# Altium PCB PCB_MRR_ESP_3DP_v0.6.pcbdoc (part 1 of 2)
Units mil, origin at the board's own origin, x right, y up, seen from the top; angles counter-clockwise.
Board outline 5400 x 5140 mil, 2 copper layers (Top Layer, Bottom Layer); 119 components, 151 nets, 453 pads, 98 vias.
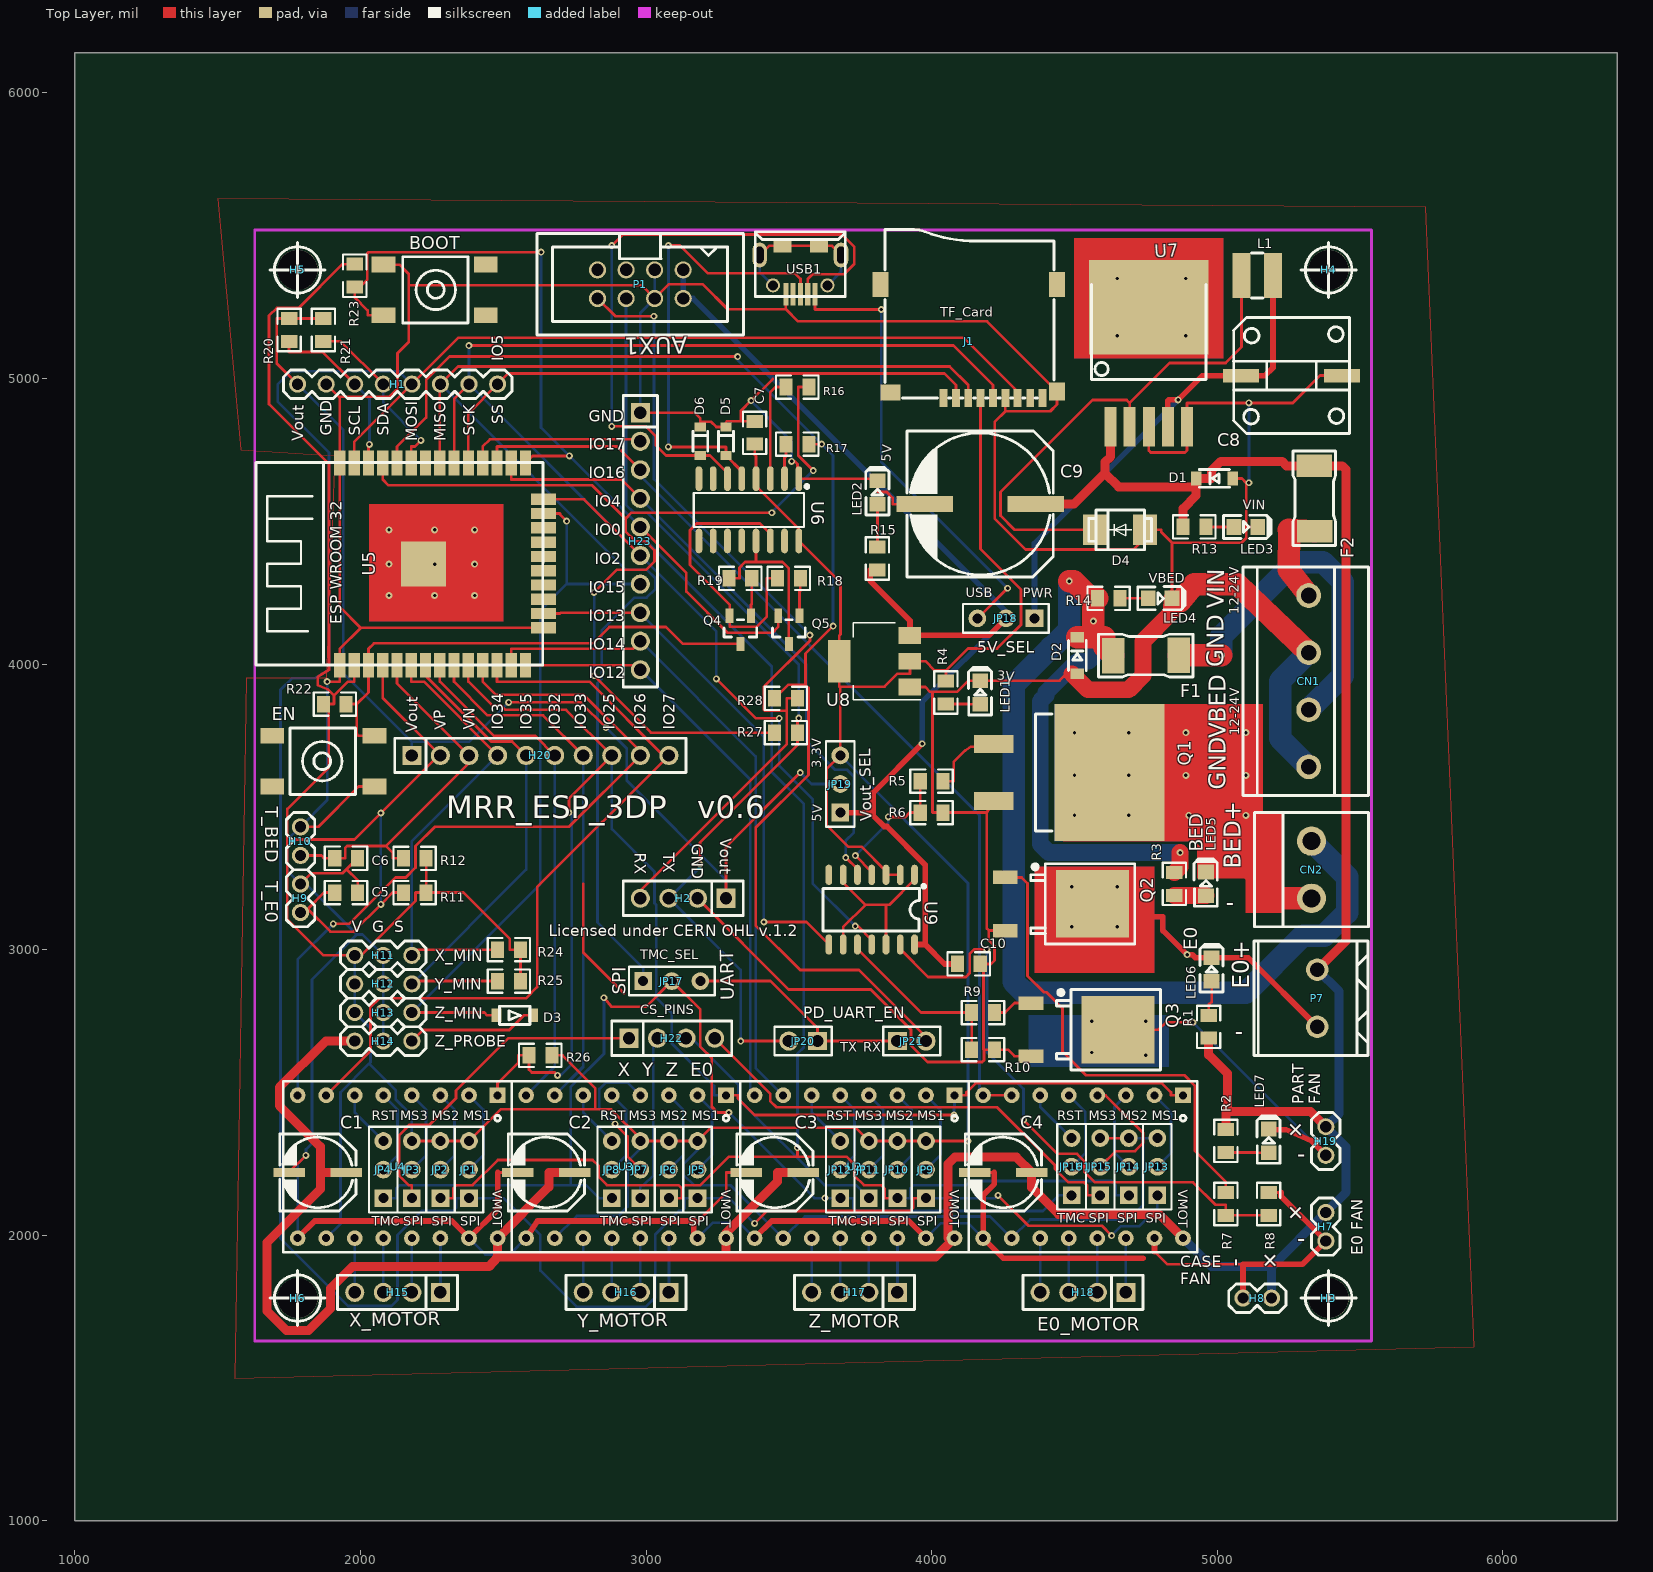
[diagram p0: Top Layer view]
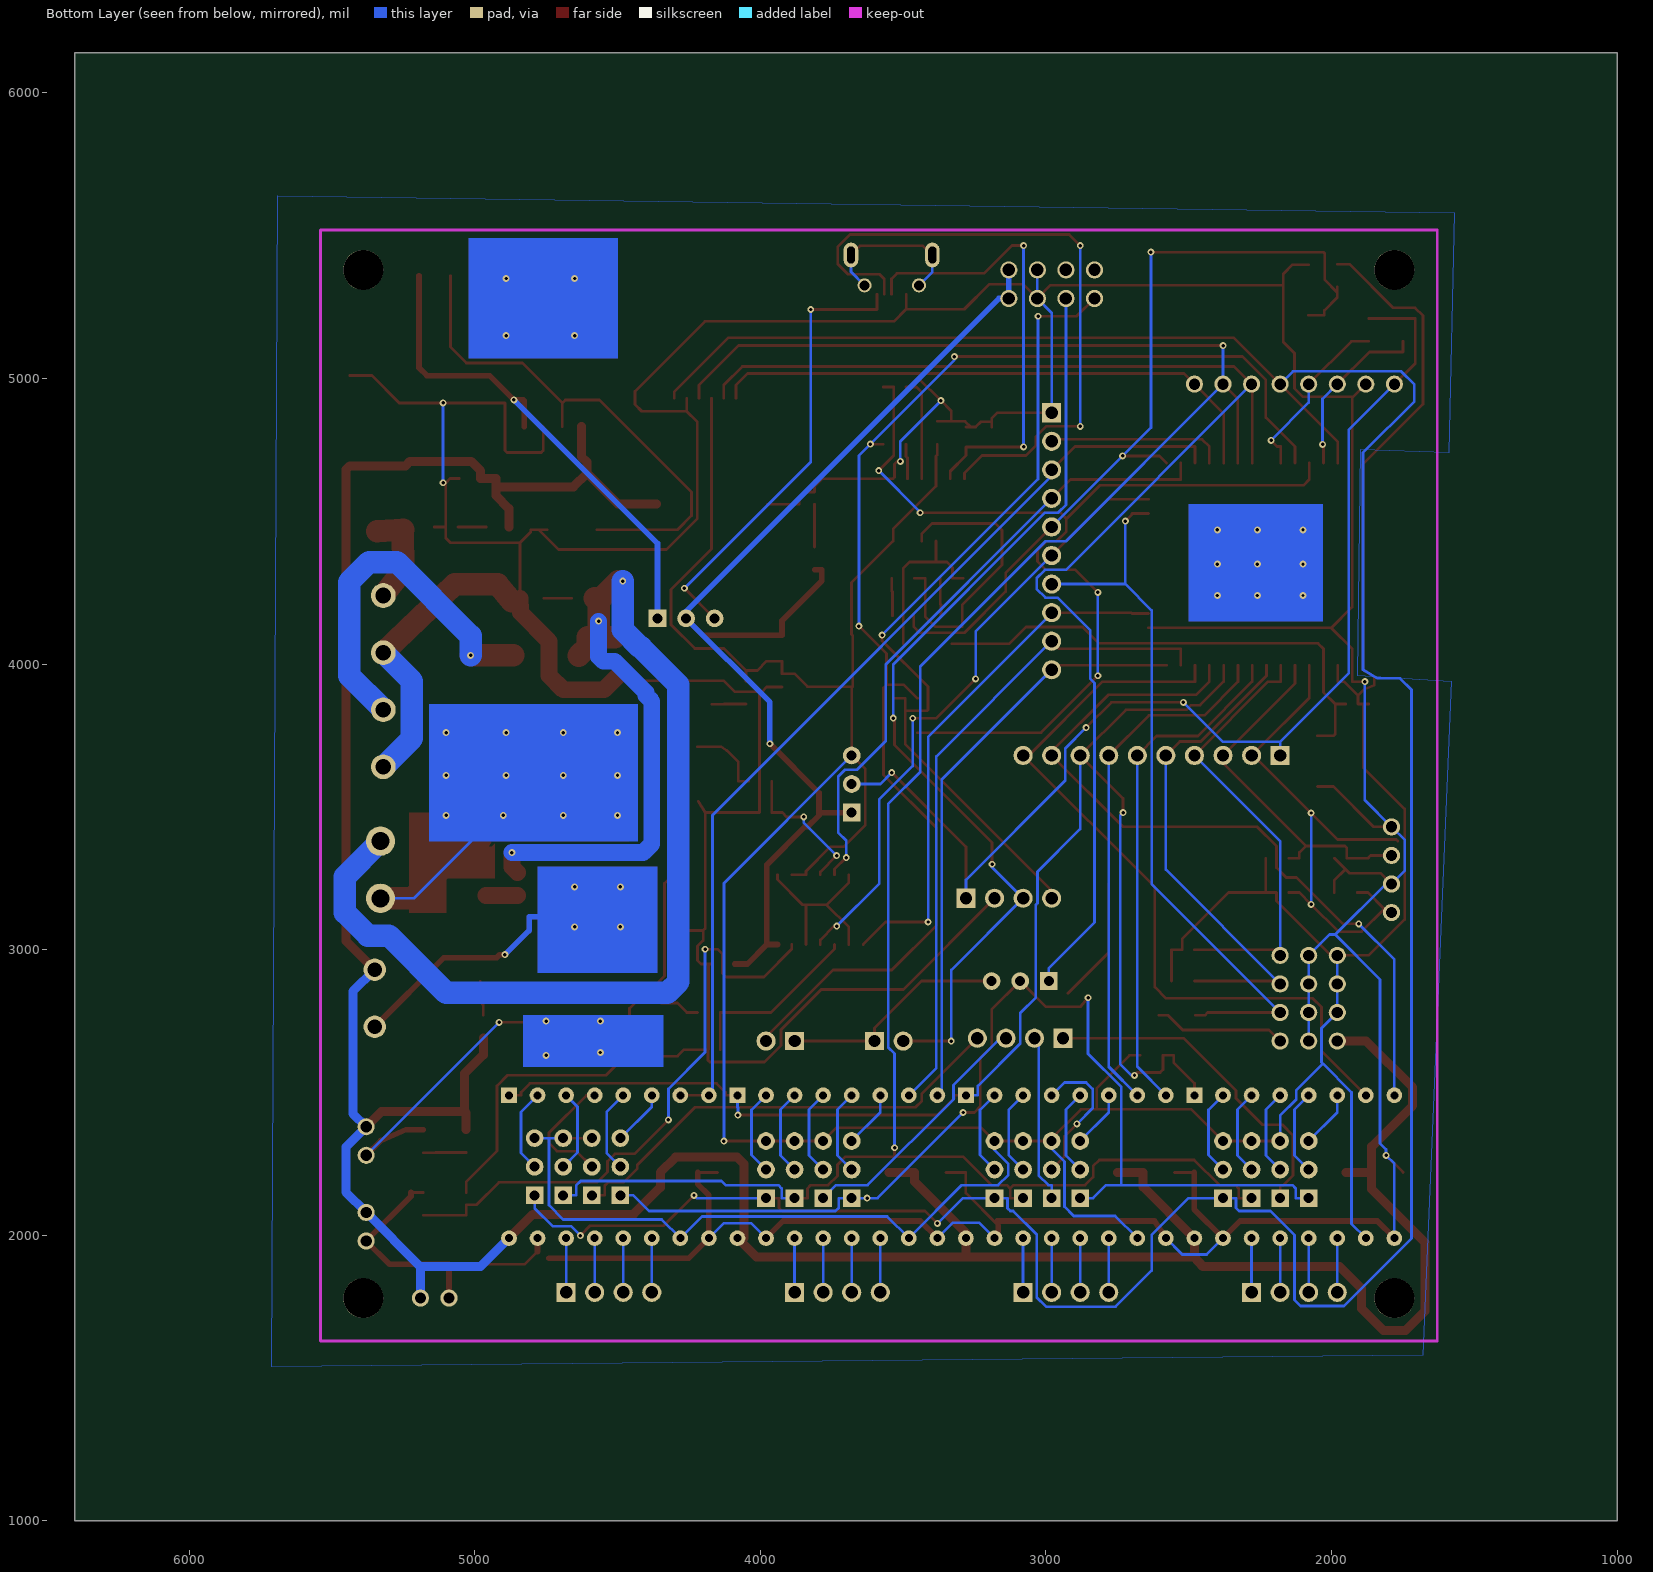
[diagram p1: Bottom Layer view, seen from below]

## Layer stack, top to bottom
Top Layer: signal copper (thickness not stored)
Dielectric: dielectric 12.6, FR-4, Dk 4.8
Bottom Layer: signal copper (thickness not stored)

## Board outline
6400,1000 1000,1000 1000,6140 6400,6140

## Components (designator, comment, footprint, x,y, rotation, side; value= is the part's Value field where it differs from the comment)
BOOT "SWITCH,6*6*2.5,SMD" KEY-6.0*6.0 2260,5310 r180 top
C1 "100uF" CAP-D6.3XH7.7 1850,2220 r0 top
C2 "100uF" CAP-D6.3XH7.7 2650,2220 r0 top
C3 "100uF" CAP-D6.3XH7.7 3450,2220 r0 top
C4 "100uF" CAP-D6.3XH7.7 4250,2220 r0 top
C5 "10uF" 0805 1950,3200 r0 top
C6 "10uF" 0805 1950,3320 r0 top
C7 "1nF" 0805 3380,4810 r90 top
C8 "330uF" CAP-T-10*10 5260,5010 r0 top
C9 "680uF" CAP-D12.5XH13.5 4170,4560 r0 top
C10 "100nF" 0805 4130,2950 r0 top
CN1 "MKDS3/4-5.08" MKDS3/4-5.08 5320,3940 r90 top
CN2 "HEATBED" MKDS3/2-5.08 5330,3280 r0 top
D1 "1N4007" SOD-123F 4990,4650 r180 top
D2 "1N4007" SOD-123F 4510,4030 r90 top
D3 "1N4148W" SOD-123FL 2540,2770 r0 top
D4 "SS54" SMB(DO-214AA) 4660,4470 r180 top
D5 "PESD5V0S1BA" SOD-323 3280,4780 r90 top
D6 "PESD5V0S1BA" SOD-323 3190,4780 r90 top
EN "SWITCH,6*6*2.5,SMD" KEY-6.0*6.0 1870,3660 r0 top
F1 "0451020.MRL" SMF_045X 4750,4030 r180 top
F2 "0451003.MRL" SMF_045X 5340,4580 r90 top
H1 "I2C/SPI" 210S-1X8P 2130,4980 r0 top
H2 "Serial" DIP-1X4P-2.54MM-M 3130,3180 r180 top
H3 "HOLE" HOLE_3MM5 5390,1780 r0 top
H4 "HOLE" HOLE_3MM5 5390,5380 r0 top
H5 "HOLE" HOLE_3MM5 1780,5380 r0 top
H6 "HOLE" HOLE_3MM5 1780,1780 r0 top
H7 "FAN_HEATSINK" 210S-1X2P 5380,2030 r270 top
H8 "FAN_CASE" 210S-1X2P 5140,1780 r180 top
H9 "T_E0" 210S-1X2P 1790,3180 r90 top
H10 "T_BED" 210S-1X2P 1790,3380 r90 top
H11 "X_MIN" 210S-1X3P 2080,2980 r0 top
H12 "Y_MIN" 210S-1X3P 2080,2880 r0 top
H13 "Z_MIN" 210S-1X3P 2080,2780 r0 top
H14 "Z_PROBE" 210S-1X3P 2080,2680 r0 top
H15 "X_MOTOR" DIP-1X4P-2.54MM-M 2130,1800 r180 top
H16 "Y_MOTOR" DIP-1X4P-2.54MM-M 2930,1800 r180 top
H17 "Z_MOTOR" DIP-1X4P-2.54MM-M 3730,1800 r180 top
H18 "E0_MOTOR" DIP-1X4P-2.54MM-M 4530,1800 r180 top
H19 "FAN_E0" 210S-1X2P 5380,2330 r270 top
H20 "ESP_PINS1" DIP-1X10P-2.54MM-M 2630,3680 r0 top
H22 "CS_PINS" DIP-1X4P-2.54MM-M 3090,2690 r0 top
H23 "ESP_PINS2" DIP-1X10P-2.54MM-M 2980,4430 r270 top
J1 "Micro SD Card Holder" MICRO-SD9+4P-SMD-16.1X14.5X1.85MM 4130,5130 r90 top
JP1 "JP_X_MS1" HDR-3X1/2.54 2380,2230 r90 top
JP2 "JP_X_MS2" HDR-3X1/2.54 2280,2230 r90 top
JP3 "JP_X_MS3" HDR-3X1/2.54 2180,2230 r90 top
JP4 "JP_X_RST" HDR-3X1/2.54 2080,2230 r90 top
JP5 "JP_Y_MS1" HDR-3X1/2.54 3180,2230 r90 top
JP6 "JP_Y_MS2" HDR-3X1/2.54 3080,2230 r90 top
JP7 "JP_Y_MS3" HDR-3X1/2.54 2980,2230 r90 top
JP8 "JP_Y_RST" HDR-3X1/2.54 2880,2230 r90 top
JP9 "JP_Z_MS1" HDR-3X1/2.54 3980,2230 r90 top
JP10 "JP_Z_MS2" HDR-3X1/2.54 3880,2230 r90 top
JP11 "JP_Z_MS3" HDR-3X1/2.54 3780,2230 r90 top
JP12 "JP_Z_RST" HDR-3X1/2.54 3680,2230 r90 top
JP13 "JP_E0_MS1" HDR-3X1/2.54 4790,2240 r90 top
JP14 "JP_E0_MS2" HDR-3X1/2.54 4690,2240 r90 top
JP15 "JP_E0_MS3" HDR-3X1/2.54 4590,2240 r90 top
JP16 "JP_E0_RST" HDR-3X1/2.54 4490,2240 r90 top
JP17 "TMC_SEL" HDR-3X1/2.54 3090,2890 r0 top
JP18 "5V_SEL" HDR-3X1/2.54 4260,4160 r180 top
JP19 "Vout_SEL" HDR-3X1/2.54 3680,3580 r90 top
JP20 "PD_UART_TX" HDR-2X1/2.54 3600,2680 r270 top
JP21 "PD_UART_RX" HDR-2X1/2.54 3880,2680 r90 top
L1 "47uH" SLF4532 5140,5360 r0 top
LED1 "LED_3V" LED-0805#1 4170,3900 r270 top
LED2 "LED_5V" LED-0805#1 3810,4600 r270 top
LED3 "LED_VIN" LED-0805#2 5100,4480 r180 top
LED4 "LED_VBED" LED-0805#2 4800,4230 r180 top
LED5 "BED" LED-0805#1 4960,3230 r270 top
LED6 "E0" LED-0805#1 4980,2930 r270 top
LED7 "FAN_E0" LED-0805#1 5180,2330 r270 top
P1 "AUX1" HDR-IDC-2.54-2X4P 2980,5330 r180 top
P7 "HOTEND_E0" WJ500V-5.08-2P 5350,2830 r90 top
Q1 "IRLS3034PBF" D2PAK 4420,3620 r270 top
Q2 "IRLR8743TRPBF" TO-252-2 4410,3160 r270 top
Q3 "IRLR8743TRPBF" TO-252-2 4500,2720 r270 top
Q4 "S9014" SOT-23(SOT-23-3) 3330,4120 r180 top
Q5 "S9014" SOT-23(SOT-23-3) 3500,4120 r180 top
R1 "1.5KΩ(152)" 0805 4970,2730 r90 top
R2 "1.5KΩ(152)" 0805 5030.01,2329.99 r270 top
R3 "1.5KΩ(152)" 0805 4850,3230 r270 top
R4 "220Ω(221)" 0805 4050.01,3899.99 r270 top
R5 "10Ω(10R)" 0805 4000,3590 r0 top
R6 "100K" 0805 4000,3480 r0 top
R7 "10Ω(10R)" 0805 5030.01,2109.99 r90 top
R8 "100K" 0805 5180.01,2109.99 r90 top
R9 "10Ω(10R)" 0805 4180,2780 r0 top
R10 "100K" 0805 4180,2650 r0 top
R11 "47KΩ(473)" 0805 2190,3200 r0 top
R12 "47KΩ(473)" 0805 2190,3320 r0 top
R13 "1.5KΩ(152)" 0805 4920,4480 r0 top
R14 "2.2K" 0805 4620.01,4229.99 r0 top
R15 "330Ω(331)" 0805 3810,4370 r90 top
R16 "0Ω" 0805 3530,4970 r0 top
R17 "0Ω" 0805 3530,4770 r0 top
R18 "12KΩ(123)" 0805 3500,4300 r0 top
R19 "12KΩ(123)" 0805 3330,4300 r0 top
R20 "4.7KΩ(472)" 0805 1750,5170 r90 top
R21 "4.7KΩ(472)" 0805 1870,5170 r90 top
R22 "12KΩ(123)" 0805 1910,3860 r180 top
R23 "12KΩ(123)" 0805 1980,5360 r90 top
R24 "10KΩ" 0805 2520,3000 r0 top
R25 "10KΩ" 0805 2520,2890 r0 top
R26 "10KΩ" 0805 2630,2630 r0 top
R27 "1KΩ" 0805 3490,3760 r0 top
R28 "1KΩ" 0805 3490,3880 r0 top
U1 "POLULU_DRIVER" POLULU_DRIVER 4880,2490 r180 top
U2 "POLULU_DRIVER" POLULU_DRIVER 4080,2490 r180 top
U3 "POLULU_DRIVER" POLULU_DRIVER 3280,2490 r180 top
U4 "POLULU_DRIVER" POLULU_DRIVER 2480,2490 r180 top
U5 "ESP32-WROOM" ESP32_WROOM_FOOTPRINT 2220,4350 r90 top
U6 "CH340C" SOP-16_150MIL 3360,4540 r270 top
U7 "LM2596SX-5.0/NOPB" TO-263-5 4760,5040 r270 top
U8 "AMS1117-3.3" SOT-223 3800,4010 r180 top
U9 "74HCT02D,653" SOIC-14_150MIL 3790,3140 r270 top
USB1 "micro USBFemale" MICRO-USB-1 3540,5380 r90 top

## Footprints (in the part's own frame and the unit in brackets; to place one, negate y for a bottom-side part, rotate by r counter-clockwise, add the part's x,y. Pads: shape width x height; smd on the part's side, far side on the other; paste and mask are expansions set on the pad)
210S-1X2P [mil]
  round 60 hole 39.37: 1(-50,0) 2(50,0)
  silkscreen extent -100,-50 100,50
210S-1X3P [mil]
  round 60 hole 39.37: 1(-100,0) 2(0,0) 3(100,0)
  silkscreen extent -150,-50 150,50
210S-1X8P [mil]
  round 60 hole 39.37: 1(-350,0) 2(-250,0) 3(-150,0) 4(-50,0) 5(50,0) 6(150,0) 7(250,0) 8(350,0)
  silkscreen extent -400,-50 400,50
0805 [mil]
  rect 45.67x57.87 smd: 1(-40,0) 2(40,0)
  silkscreen extent -75,-41 74,41
CAP-D6.3XH7.7 [mm]
  rect 2.8x0.8 smd: 1(2.54,0) 2(-2.54,0)
  silkscreen extent -3.37,-3.43 3.43,3.43
CAP-D12.5XH13.5 [mm]
  rect 5x1.4 smd: 1(4.928,0) 2(-4.928,0)
  silkscreen extent -6.5,-6.5 6.5,6.5
CAP-T-10*10 [mm]
  rect 3.2x1.2 smd: 1(-4.501,0) 2(4.501,0)
  silkscreen extent -5.15,-5.15 5.15,5.15
D2PAK [mil]
  rect 63x137.8 smd: 1(-100,-202.5) 3(100,-202.5)
  rect 480.3x383.9 smd: 2(0,202.5)
  silkscreen extent -205,-57 205,2
DIP-1X4P-2.54MM-M [mm]
  rect 1.7x1.7 hole 1.1: 1(-3.81,0)
  round 1.7 hole 1.1: 2(-1.27,0) 3(1.27,0) 4(3.81,0)
  silkscreen extent -5.33,-1.52 5.33,1.52
DIP-1X10P-2.54MM-M [mm]
  rect 1.7x1.7 hole 1.1: 1(-11.43,0)
  round 1.7 hole 1.1: 2(-8.89,0) 3(-6.35,0) 4(-3.81,0) 5(-1.27,0) 6(1.27,0) 7(3.81,0) 8(6.35,0) 9(8.89,0) 10(11.43,0)
  silkscreen extent -12.95,-1.52 12.95,1.52
ESP32_WROOM_FOOTPRINT [mm]
  rect 2.2x1 smd: 1(-8.989,7.423) 2(-8.992,6.147) 3(-8.994,4.879) 4(-8.994,3.609) 5(-8.994,2.339) 6(-8.994,1.069) 7(-8.994,-0.201) 8(-8.997,-1.468) 9(-8.997,-2.738) 10(-8.997,-4.008) 11(-8.997,-5.278) 12(-8.994,-6.551) 13(-8.994,-7.821) 14(-8.994,-9.091) 25(8.992,-9.093) 26(8.992,-7.823) 27(8.992,-6.553) 28(8.989,-5.281) 29(8.989,-4.011) 30(8.989,-2.741) 31(8.989,-1.471) 32(8.992,-0.203) 33(8.992,1.067) 34(8.992,2.337) 35(8.992,3.607) 36(8.992,4.877) 37(8.994,6.144) 38(8.997,7.421)
  rect 1x2.2 smd: 15(-5.667,-10.693) 16(-4.397,-10.693) 17(-3.127,-10.693) 18(-1.859,-10.696) 19(-0.589,-10.696) 20(0.681,-10.696) 21(1.951,-10.696) 22(3.223,-10.693) 23(4.493,-10.693) 24(5.763,-10.693)
  rect 4x4 smd: 39(-0.001,-0.011)
  silkscreen extent -8.97,-10.63 9.03,14.87
HDR-2X1/2.54 [mm]
  rect 1.575x1.7 hole 1.1: 1(0,0)
  round 1.7 hole 1.1: 2(0,-2.54)
  silkscreen extent -1.27,-3.81 1.27,1.27
HDR-3X1/2.54 [mil]
  rect 62x62 hole 35: 1(-100,0)
  round 62 hole 35: 2(0,0) 3(100,0)
  silkscreen extent -150,-50 150,50
HDR-IDC-2.54-2X4P [mil]
  round 60 hole 43.3: 1(-150,-50) 2(-150,50) 3(-50,-50) 4(-50,50) 5(50,-50) 6(50,50) 7(150,-50) 8(150,50)
  silkscreen extent -361,-177 362,178
HOLE_3MM5 [mil]
  round 140 hole 140: 1(0,0)
  silkscreen extent -96,-96 96,96
KEY-6.0*6.0 [mm]
  rect 2.1x1.4 smd: 1(4.55,-2.252) 2(-4.553,-2.252) 3(4.553,2.252) 4(-4.553,2.249)
  silkscreen extent -2.95,-2.95 2.85,2.95
LED-0805#1 [mil]
  rect 51.2x55.1 smd: 1(40.7,0.05) 2(-42,0.05)
  silkscreen extent -88,-41 78,40
LED-0805#2 [mil]
  rect 51.2x55.1 smd: 1(41.4,-0.05) 2(-41.3,-0.05)
  silkscreen extent -88,-41 78,40
MICRO-SD9+4P-SMD-16.1X14.5X1.85MM [mil]
  rect 63x27.6 smd: 1(-199,89) 2(-199,45) 3(-199,2) 4(-199,-41) 5(-199,-85) 6(-199,-128) 7(-199,-171) 8(-199,-215) 9(-199,-258)
  rect 63x55.1 smd: G1(-175,-309.05)
  rect 86.6x55.1 smd: G2(199,-309.05) G3(199,308.95)
  rect 55.1x70.9 smd: G4(-179.05,273.95)
  silkscreen extent -199,-298 392,293
MICRO-USB-1 [mm]
  round 1.25 hole 0.9: 0(-1.371,2.431) 0(-1.371,-2.41)
  oval 2.2x1.3 hole 0.7 slot 1.5 at 0 deg: 0(1.329,3.619) 0(1.329,-3.619)
  rect 1.2x1.6 smd: 0(2.14,-1.684) 0(2.156,1.595)
  rect 2x0.45 smd: 1(-2.156,-1.311) 2(-2.156,-0.66) 3(-2.156,-0.011) 4(-2.156,0.639) 5(-2.156,1.289)
  silkscreen extent -2.36,-4 3.4,4
MKDS3/2-5.08 [mm]
  round 2.6 hole 1.6: 1(0,-2.54) 2(0,2.54)
  silkscreen extent -5.08,-5.08 5.08,5.08
MKDS3/4-5.08 [mm]
  round 2.2 hole 1.4: 1(-7.62,0) 2(-2.54,0) 3(2.54,0) 4(7.62,0)
  silkscreen extent -10.16,-5.33 10.16,5.84
POLULU_DRIVER [mil]
  rect 55x55 hole 28: 1(0,0)
  round 55 hole 28: 2(100,0) 3(200,0) 4(300,0) 5(400,0) 6(500,0) 7(600,0) 8(700,0) 9(700,500) 10(600,500) 11(500,500) 12(400,500) 13(300,500) 14(200,500) 15(100,500) 16(0,500)
  silkscreen extent -50,-50 750,550
SLF4532 [mm]
  rect 1.6x4 smd: 1(-1.4,0) 2(1.4,0)
  silkscreen extent -0.5,-2 0.5,2
SMB(DO-214AA) [mil]
  rect 85x108 smd: 1(-87,0) 2(87,0)
  silkscreen extent -110,-70 110,70
SMF_045X [mil]
  rect 78.74x124.02 smd: 1(-114.35,-0.5) 2(114.35,0.5)
  silkscreen extent -165,-74 166,75
SOD-123F [mil]
  rect 35.8x48 smd: 1(-64,0) 2(64,0)
  silkscreen extent -53,-31 53,31
SOD-123FL [mil]
  rect 35.8x48 smd: 1(64,0) 2(-64,0)
  silkscreen extent -53,-32 53,32
SOD-323 [mm]
  rect 0.8x1 smd: 1(-1.269,0) 2(1.271,0)
  silkscreen extent -0.89,-0.66 0.89,0.66
SOIC-14_150MIL [mm]
  oval 1.8x0.6 smd: 1(-3.099,3.81) 2(-3.099,2.54) 3(-3.099,1.27) 4(-3.099,0) 5(-3.099,-1.27) 6(-3.099,-2.54) 7(-3.099,-3.81) 8(3.099,-3.81) 9(3.099,-2.54) 10(3.099,-1.27) 11(3.099,0) 12(3.099,1.27) 13(3.099,2.54) 14(3.099,3.81)
  silkscreen extent -2.23,-4.34 1.91,4.77
SOP-16_150MIL [mm]
  oval 2.2x0.6 smd: 1(-2.769,4.445) 2(-2.769,3.175) 3(-2.769,1.905) 4(-2.769,0.635) 5(-2.769,-0.635) 6(-2.769,-1.905) 7(-2.769,-3.175) 8(-2.769,-4.445) 9(2.769,-4.445) 10(2.769,-3.175) 11(2.769,-1.905) 12(2.769,-0.635) 13(2.769,0.635) 14(2.769,1.905) 15(2.769,3.175) 16(2.769,4.445)
  silkscreen extent -2.23,-4.9 1.52,5.3
SOT-23(SOT-23-3) [mm]
  rect 0.7x1.25 smd: 1(-0.95,-1.25) 2(0.95,-1.25) 3(0,1.25)
  silkscreen extent -1.46,-0.9 1.46,0.65
SOT-223 [mm]
  rect 2x1.5 smd: 1(-3.15,2.3) 2(-3.15,0) 3(-3.15,-2.3)
  rect 2x3.8 smd: 4(3.15,0)
  silkscreen extent -4.1,-3.41 1.91,3.41
TO-252-2 [mm]
  rect 1.2x2.2 smd: 1(-2.362,-3.876) 3(2.362,-3.871)
  rect 6x6.5 smd: 4(0,3.877)
  silkscreen extent -3.57,-1.61 3.57,7.64
TO-263-5 [mil]
  rect 137.79x42.1 smd: 1(209,-133.95) 2(209,-66.95) 3(209,0.05) 4(209,67.05) 5(209,134.05)
  rect 329.92x419.68 smd: 6(-209,0)
  silkscreen extent -289,-200 44,200
WJ500V-5.08-2P [mm]
  round 2 hole 1.3: 1(-2.54,0) 2(2.54,0)
  silkscreen extent -5.08,-4.52 5.08,5.64

## Via types
v1: diameter 24.02, hole 12.2, Top Layer to Bottom Layer, 56 vias
v2: diameter 24.4, hole 12, Top Layer to Bottom Layer, 42 vias

## Nets (pads, with @x,y where several pads share a name; then routed paths per layer and width w, separated by ;. In a path a pad name is that pad's centre, name@x,y a point inside that pad or via, vN(x,y) a via of type N, cw(c..) or ccw(c..) an arc to the next point about the centre after c; other vN are vias at no path point)
1Y: U9.1 U9.6 U9.9 U9.12 | length 672.8
  Top Layer w9.45: U9.9@3690,3018 3690,3079 3767.8,3156.9 ; U9.6@3690,3262 3690,3234.7 3767.8,3156.9 ; U9.12@3840,3018 3840,3156.9 ; U9.1@3940,3262 3940,3245.4 3851.5,3156.9 3840,3156.9 ; 3767.8,3156.9 3840,3156.9
5V1: C8.1 JP18.1 L1.2 U7.4 | length 1802
  Top Layer w19.68: U7.4@4827.1,4831 4827.1,4921.6 4830.3,4924.8 v1(4862.5,4924.8) 4947.6,5010 C8.1@5082.8,5010 5125.1,5010 5167.5,5010 5195.1,5037.6 L1.2@5195.1,5360
  Bottom Layer w19.68: JP18.1@4360,4160 4360,4422.4 v1(4862.5,4924.8)
+3.3V: C7.1 H11.1 H12.1 H13.1 J1.4 JP1.3 JP2.3 JP3.3 JP5.3 JP6.3 JP7.3 JP9.3 JP10.3 JP11.3 JP13.3 JP14.3 JP15.3 JP19.3 R4.1 R11.2 R12.2 R22.2 R23.2 R24.2 R25.2 R26.2 U1.10 U2.10 U3.10 U4.10 U5.2 U6.4 U6.16 U8.2 U8.4 U9.2 U9.3 | length 15908.7
  Top Layer w9.45: R22.2@1870,3860 R22.2@1888.5,3860 ; U5.2@1978,3996 1978,3938.4 1955.8,3938.4 1907.1,3889.7 ; R23.2@1980,5400 1936.8,5400 1783.9,5247.1 1707.6,5247.1 1680,5220 1680,4910 1890,4700 1890,3980 1850,3956 1850,3926 1884.5,3912.3 1907.1,3889.7 ; JP3.3@2180,2330 JP2.3@2280,2330 JP1.3@2380,2330 2490.9,2440.9 2822.3,2440.9 ; R12.2@2229.99,3320.01 R11.2@2229.99,3200.01 ; R25.2@2560,2890 R24.2@2560,3000 2522.9,3000 2522.9,3037.1 2360,3200 R11.2@2229.99,3200.01 ; R26.2@2670,2630 2707.1,2630 2822.3,2514.7 2822.3,2440.9 ; C7.1@3379.99,4769.99 3380,4732.9 3385,4727.9 U6.4@3385,4649 3385,4622.9 3535,4472.9 U6.16@3535,4431 3680.9,4285.1 3680.9,4104 3676,4099.1 U8.4@3676,4010 3676,3920.9 3680,3920.9 ; U9.2@3890,3262 U9.3@3840,3262 3840,3274.5 3753.7,3360.8 3707.7,3360.8 3632.1,3436.3 3632.1,3632.1 JP19.3@3680,3680 3680,3920.9 ; R4.1@4050.1,3940 4050.1,3977.1 ; v1(4127.5,2330) JP9.3@3980,2330 JP10.3@3880,2330 JP11.3@3780,2330 3733.1,2376.9 3226.9,2376.9 JP5.3@3180,2330 JP6.3@3080,2330 JP7.3@2980,2330 2980,2338.4 2877.5,2440.9 2822.3,2440.9 ; J1.4@4171,4931 4171,4885.2 4171,4402.5 4312.4,4261.1 4312.4,4137.7 4229.1,4054.4 4127.4,4054.4 4050.1,3977.1 ; JP15.3@4590,2340 JP14.3@4690,2340 ; R22.2@1888.5,3860 1888.5,3636.8 1744.1,3492.4 1744.1,3105.8 1869.9,2980 H11.1@1980,2980 2002.5,2980 2192.9,3170.4 2192.9,3200 R11.2@2229.99,3200.01 ; R22.2@1888.5,3860 1907.1,3860 1907.1,3889.7 ; 3680,3920.9 3834.9,3920.9 3880.2,3966.2 3924,3966.2 U8.2@3924,4010 3950.8,4010 3977.7,4010 4010.6,3977.1 4050.1,3977.1
  Bottom Layer w9.45: U4.10@1880,1990 1930,2040 1930,2500.5 2030.3,2600.8 ; H11.1@1980,2980 H12.1@1980,2880 H13.1@1980,2780 2035.1,2724.9 2035.1,2605.6 2030.3,2600.8 ; JP3.3@2180,2330 2180,2419.6 2123.3,2476.3 2123.3,2507.9 2030.3,2600.8 ; U3.10@2680,1990 2757.8,2067.8 2902.5,2067.8 2934.7,2100 2934.7,2257.8 2980,2303.1 JP7.3@2980,2330 ; JP5.3@3180,2330 3180,2298.6 3131.7,2250.3 3131.7,2210.9 3167.3,2175.3 3294.7,2175.3 U2.10@3480,1990 3555.7,2065.7 4204.3,2065.7 U1.10@4280,1990 4345.5,2055.5 4690.2,2055.5 4740,2105.3 4740,2340 ; JP19.3@3680,3680 4127.5,3232.5 v1(4127.5,2330) ; JP14.3@4690,2340 4740,2340 ; JP13.3@4790,2340 4740,2340
+5V: C10.1 JP18.2 JP19.1 P1.1 P1.2 R15.1 U8.3 U9.14 | length 4090.4
  Top Layer w19.68: JP19.1@3680,3480 3794.5,3480 ; R15.1@3809.99,4329.99 3784.7,4330 3784.7,4291.1 3924,4151.8 3924,4100.5 4200.6,4100.5 JP18.2@4260,4160 ; U9.14@3940,3018 3977.5,3018 ; v1(3966.6,3721.1) 3794.5,3549 3794.5,3480 ; C10.1@4090,2950 4045.5,2950 3977.5,3018 ; 3794.5,3480 3794.5,3470.4 3833.8,3431.1 3843.4,3431.1 3977.5,3297 3977.5,3018
  Bottom Layer w19.68: P1.1@3130,5380 P1.2@3130,5280 3164.6,5280 4260,4184.6 JP18.2@4260,4160 3966.6,3866.6 v1(3966.6,3721.1)
BOOT_2: BOOT.2
BOOT_4: BOOT.4
D3_1: D3.1 H14.3 | length 461.3
  Top Layer w9.45: H14.3@2180,2680 2219,2719 2520.9,2719 2571.8,2770 D3.1@2604,2770
DTR: Q5.3 R19.1 U6.13 | length 602.5
  Top Layer w9.45: R19.1@3289.99,4300.01 3327.1,4300 3327.1,4337.1 3347,4357 3385,4357 ; U6.13@3385,4431 3385,4357 ; Q5.3@3500,4070.8 3500,4334.8 3477.8,4357 3385,4357
E0_CS: H22.4 JP15.1 | length 1620.6
  Top Layer w9.45: H22.4@3240,2690 3434.3,2495.7 3434.3,2469.8 3455.9,2448.2 4229.2,2448.2 4430.4,2247 4430.4,2233.8 4479,2185.3 4533.4,2185.3 4544.7,2173.9 4544.7,2140 JP15.1@4590,2140
E0_DIR_PIN: H23.2 U5.28 | length 623.1
  Top Layer w9.45: U5.28@2427.9,4703.9 2427.9,4761.5 2453.5,4787 2973,4787 H23.2@2980,4780
E0_MS1: JP13.2 U1.2 | length 294.1
  Bottom Layer w9.45: U1.2@4780,2490 4838.2,2431.8 4838.2,2288.2 JP13.2@4790,2240
E0_MS2: JP14.2 U1.3 | length 287.3
  Bottom Layer w9.45: U1.3@4680,2490 4640,2450 4640,2290 JP14.2@4690,2240
E0_MS3: JP15.2 U1.4 | length 434.6
  Top Layer w9.45: U1.4@4580,2490 4608.9,2490 4740,2358.9 4740,2323 4711.8,2294.7 4644.7,2294.7 JP15.2@4590,2240
E0_RST: JP16.2 U1.5 | length 294.1
  Bottom Layer w9.45: U1.5@4480,2490 4538.2,2431.8 4538.2,2288.2 JP16.2@4490,2240
E0_SLP: JP16.3 U1.6 | length 195.6
  Bottom Layer w9.45: U1.6@4380,2490 4380,2450 JP16.3@4490,2340
E0_STEP_PIN: H23.3 U1.7 U1.8 U5.27 | length 3380.5
  Top Layer w9.45: U5.27@2478,4704 2478,4761.6 2898.4,4761.6 H23.3@2980,4680 ; U1.8@4180,2490 U1.7@4280,2490
  Bottom Layer w9.45: H23.3@2980,4680 2980,4657.9 4167.3,3470.6 4167.3,2502.7 U1.8@4180,2490
EN: EN.3 Q4.3 R22.1 U5.3 | length 1775.6
  Top Layer w9.45: R22.1@1950,3860 1968.5,3860 1987.1,3860 ; EN.3@2049.3,3748.6 1993.6,3748.6 1987.1,3755.2 1987.1,3860 ; Q4.3@3330,4070.8 3129,4070.8 3069.8,4130 2871.6,4130 2814.1,4072.5 2046.9,4072.5 2027.9,4053.5 U5.3@2027.9,3995.9 2027.9,3967.1 2027.9,3938.3 2027.9,3900.8 1987.1,3860
EN_2: EN.2
EN_4: EN.4
F1_1: CN1.2 F1.1 | length 1276.1
  Top Layer w78.74: F1.1@4864.35,4030.5 v1(5014.4,4030.5)
  Bottom Layer w78.74: v1(5014.4,4030.5) 5014.4,4098.6 5272.7,4357 5369.6,4357 5439.8,4286.8 5439.8,3959.8 CN1.2@5320,3840
F2_1: CN1.4 F2.1 | length 346.3
  Top Layer w78.74: CN1.4@5320,4240 5250,4330 5251.9,4469.7 5250,4470 F2.1@5340.5,4465.65
FAN_E0_PIN: H23.8 U5.16 U9.8 | length 1862.9
  Top Layer w9.45: U5.16@2641,4176.9 2698.6,4176.9 2701.7,4180 H23.8@2980,4180 ; v1(3412.3,3096.9) 3561.1,3096.9 U9.8@3640,3018
  Bottom Layer w9.45: H23.8@2980,4180 2980,4177.1 3412.3,3744.9 v1(3412.3,3096.9)
GND: BOOT.1 C1.2 C2.2 C3.2 C4.2 C5.2 C6.2 C7.2 C8.2 C9.2 C10.2 CN1.1 CN1.3 D1.1 D2.1 D4.1 D5.2 D6.2 EN.1 H1.2 H2.2 H7.2 H8.2 H9.2 H10.2 H11.2 H12.2 H13.2 H14.2 H23.1 J1.6 J1.G1 LED1.2 LED2.2 LED3.2 LED4.2 P1.3 P1.4 Q1.3 Q2.3 Q3.3 R6.2 R8.2 R10.2 U1.9 U1.15 U2.9 U2.15 U3.9 U3.15 U4.9 U4.15 U5.1 U5.15 U5.38 U6.1 U7.3 U7.5 U8.1 USB1.5 | length 24627.3
  Top Layer w9.45: C1.2@1750,2220 1750,2220.9 v1(1809,2279.9) ; H9.2@1790,3230 1828.1,3268 1938.1,3268 1951.6,3281.6 ; H10.2@1790,3430 1852.2,3430 1993.5,3571.3 EN.1@2049.2,3571.3 ; H1.2@1880,4980 1924.3,4935.7 1927.9,4935.7 ; v1(1883.2,3938.5) 1927.8,3938.5 U5.1@1927.75,3996.1 1927.8,4053.7 2001,4126.9 ; C5.2@1990,3200 1990,3243.2 1951.6,3281.6 ; C6.2@1990,3320 1951.6,3281.6 ; BOOT.1@2080.9,5398.6 2136.5,5398.6 2169.1,5366 2169.1,5326.7 ; 2480.6,2220 C2.2@2550,2220 ; U5.15@2641,4126.9 2001,4126.9 ; H23.1@2980,4880 3170.1,4880 3190,4860.1 3190,4848.3 ; 3166.9,2033.7 3280.6,2147.5 3280.6,2220 C3.2@3350,2220 ; H2.2@3180,3180 3499.3,2860.7 3786.7,2860.7 3927.7,2719.7 3927.7,2664.7 3985.6,2606.8 4176.8,2606.8 4182.9,2612.9 4182.9,2650 ; D6.2@3190,4830.05 3190,4839.2 3190,4848.3 ; D5.2@3280,4830.05 D5.2@3263,4830 ; C7.2@3379.99,4849.99 3331.5,4850 ; 3444,4998.3 v2(3367.85,4922.15) 3331.5,4885.8 3331.5,4850 ; USB1.5@3489.3,5295.1 3489.3,5242.2 ; v2(3510,4710) 3520,4710 3530,4700 3530,4654 U6.1@3535,4649 3783.1,4649 LED2.2@3810.1,4622.1 ; LED2.2@3810.1,4642 LED2.2@3810.1,4622.1 ; U8.1@3924,3919.45 3977.7,3919.4 3994.2,3902.9 4002.9,3902.9 ; C9.2@3976,4560 3863.3,4560 3863.3,4581.5 3842.7,4602.1 3810.1,4602.1 LED2.2@3810.1,4622.1 ; C4.2@4150,2220 4219.4,2220 ; C10.2@4170,2950 C10.2@4181.2,2950 ; Q1.3@4217.5,3520 4192.9,3480 ; Q2.3@4257.6,3067 4200,3067 ; J1.6@4258,4931 4258,4885.2 ; Q3.3@4347.6,2627 4290,2627 4267,2650 R10.2@4219.96,2650.01 4182.9,2650 ; D2.1@4510,3966 4490.9,3966 4471.7,3966 4447.7,3942 4170.1,3942 4128.2,3942 4089.2,3902.9 4002.9,3902.9 ; D4.1@4747,4470 D4.1@4775.4,4470 ; U7.3@4760.1,4831 4760.1,4789.4 4760.1,4747.8 4767.1,4740.8 4887,4740.8 4894.1,4747.8 4894.1,4831 4894.1,4872.6 4894.1,4914.2 v1(5110.9,4914.2) 5264.1,4914.2 5359.9,5010 C8.2@5437.2,5010 ; 4780,1943.4 4825,1898.4 5090,1898.4 ; LED4.2@4841.3,4230.05 4841.3,4271.9 4841.3,4424.8 ; D1.1@5054,4650 5086.2,4650 v1@5101.4,4634.7 ; v1(5110.9,4634.7) v1@5101.4,4634.7 ; LED3.2@5141.3,4480.05 5101.4,4480 ; R8.2@5180,2149.9 5223.2,2149.9 ; 1927.9,4935.7 2100.6,4935.7 2130,4965.1 2130,5088.3 2169.1,5127.4 2169.1,5326.7 ; 1927.9,4935.7 1927.9,4761.8 1927.9,4704.2 1927.9,4200 2001,4126.9 ; 2169.1,5326.7 2983.3,5326.7 P1.4@3030,5280 3080,5330 3198.1,5330 3285.9,5242.2 3489.3,5242.2 ; 3190,4848.3 3227.8,4848.3 3246,4830 D5.2@3263,4830 ; D5.2@3263,4830 3283,4850 3331.5,4850 ; 3489.3,5242.2 3531.3,5200.1 4193.9,5200.1 4439.1,4955 4439.1,4909.2 4415.1,4885.2 4258,4885.2 ; 4002.9,3902.9 4002.9,3480 R6.2@4039.99,3480.01 4077.1,3480 4192.9,3480 ; C10.2@4181.2,2950 4181.2,2651.7 4182.9,2650 ; C10.2@4181.2,2950 4207.1,2950 4219.8,2962.7 4219.8,3012.6 4200,3032.3 4200,3067 ; 4192.9,3480 4192.9,3074.1 4200,3067 ; 4258,4885.2 4221.3,4848.6 4221.3,4508.6 4328.9,4401 4706.4,4401 D4.1@4775.4,4470 ; D4.1@4775.4,4470 4803.8,4470 4803.8,4462.3 4841.3,4424.8 ; 4841.3,4424.8 5084.1,4424.8 5101.4,4442.1 5101.4,4480 ; 5101.4,4480 v1@5101.4,4634.7
  Top Layer w19.68: U4.9@1780,1990 1840,2050 2320,2050 U4.15@2380,1990 2480.6,2090.6 2480.6,2220 ; U3.9@2580,1990 2620,2050 3170,2050 ; 3166.9,2033.7 3166.9,2003.1 U3.15@3180,1990 ; U2.9@3380,1990 3440,2050 3920,2050 U2.15@3980,1990 ; 4219.4,2220 4219.4,2179.4 4180,2140 U1.9@4180,1990 4250,1920 4740,1920 ; 4780,1943.4 U1.15@4780,1990 ; H8.2@5090,1780 5090,1898.4 5298.4,1898.4 H7.2@5380,1980 5223.2,2136.8 5223.2,2149.9
  Top Layer w59.05: D2.1@4490.9,3966 4546.7,3910 4690,3910 4740,3960 4740,4079.9 4840,4180 4840,4190 LED4.2@4841.3,4230.05
  Top Layer w78.74: 4870,4220 4920,4280 5070,4280 CN1.3@5320,4040
  Bottom Layer w9.45: U4.9@1780,1990 1780,2250.9 v1(1809,2279.9) 1809,2300.9 1830,2321.9 1830,2895.7 1987.1,3052.9 ; v1(1883.2,3938.5) 1883.2,3523.1 H10.2@1790,3430 1743.5,3383.5 1743.5,3276.5 H9.2@1790,3230 1810,3230 1987.1,3052.9 ; H14.2@2080,2680 H13.2@2080,2780 H12.2@2080,2880 H11.2@2080,2980 2007.1,3052.9 1987.1,3052.9 ; U4.15@2380,1990 2437.4,1932.6 2522.7,1932.6 U3.9@2580,1990 ; H23.1@2980,4880 2980,5230 P1.4@3030,5280 P1.3@3030,5380 ; U3.15@3180,1990 3234.1,2044.1 3325.9,2044.1 U2.9@3380,1990 ; v2@3370,4920 3510,4780 v2(3510,4710) ; U2.15@3980,1990 4032.6,2042.6 4127.4,2042.6 U1.9@4180,1990 ; v1(5110.9,4634.7) v1(5110.9,4914.2)
  Bottom Layer w78.74: CN1.1@5320,3640 5220,3740 5220,3939.9 CN1.3@5320,4040
HEATER_BED_PIN: H23.4 U5.26 U9.5 | length 2217.9
  Top Layer w9.45: U5.26@2528,4704 2528,4646.4 2913.6,4646.4 H23.4@2980,4580 ; v1(3699.2,3322.5) 3740,3281.7 U9.5@3740,3262
  Bottom Layer w9.45: H23.4@2980,4580 3560.8,3999.2 3560.8,3730.6 3661.3,3630 3703.1,3630 3727.6,3605.5 3727.6,3409.9 3699.2,3381.5 v1(3699.2,3322.5)
HEATER_E0_PIN: H23.6 U5.24 U9.11 | length 2172.2
  Top Layer w9.45: U5.24@2641,4576.9 2783.1,4576.9 H23.6@2980,4380 ; v1(3246,3948.3) 3383.8,3810.5 v1(3466.5,3810.5) ; v1(3732.3,3082.4) 3742,3082.4 3790,3034.4 U9.11@3790,3018
  Bottom Layer w9.45: H23.6@2980,4380 3246,4114 v1(3246,3948.3) ; v1(3466.5,3810.5) 3466.5,3643.1 3583.9,3525.6 3583.9,3230.7 v1(3732.3,3082.4)
IO0: BOOT.3 H23.5 Q5.2 R23.1 U5.25 | length 2928.7
  Top Layer w9.45: R23.1@1980,5320 R23.1@1980,5301.5 ; BOOT.3@2080.8,5221.3 2053,5221.3 2025.1,5221.3 2025.1,5237.8 1980,5282.9 R23.1@1980,5301.5 ; U5.25@2578,4704 2602.7,4728.7 v1(2731.3,4728.7) ; v1(2632.4,5442.1) 2028.6,5442.1 2024.2,5437.7 2024.2,5345.7 R23.1@1980,5301.5 ; H23.5@2980,4480 3140.9,4319.1 3140.9,4254 3285.3,4109.7 3441.9,4109.7 3462.6,4130.3 Q5.2@3462.6,4169.2
  Bottom Layer w9.45: v1(2632.4,5442.1) 2632.4,4827.6 v1(2731.3,4728.7) H23.5@2980,4480
J1_1: J1.1
J1_8: J1.8
J1_9: J1.9
J1_G2: J1.G2
J1_G3: J1.G3
J1_G4: J1.G4
LED1_1: LED1.1 R4.2 | length 120.3
  Top Layer w9.45: R4.2@4050.1,3860 4127.5,3860 4128.2,3859.3 LED1.1@4170.1,3859.3
LED2_1: LED2.1 R15.2 | length 149.3
  Top Layer w9.45: R15.2@3809.99,4409.99 3810,4447 3810.1,4447.1 LED2.1@3810.1,4559.3
LED3_1: LED3.1 R13.2 | length 98.6
  Top Layer w9.45: R13.2@4960,4480 5018.7,4480 LED3.1@5058.6,4480.05
LED4_1: LED4.1 R14.2 | length 98.6
  Top Layer w9.45: R14.2@4660,4230 4718.7,4230 LED4.1@4758.6,4230.05
LED5_1: LED5.1 R3.2 | length 110.4
  Top Layer w59.05: R3.2@4850.01,3190.01 4917.5,3190 4918.2,3189.3 LED5.1@4960.1,3189.3
LED5_2: CN2.1 LED5.2 Q1.2 | length 1752.5
  Top Layer w9.45: Q1.2@4622.5,3580 4657.5,3615 4780,3615 5036.5,3358.5 5036.5,3306.7 ; LED5.2@4960.1,3272 5001.9,3272 5036.5,3306.7 ; 5091.7,3306.7 5036.5,3306.7
  Top Layer w78.74: 5091.7,3306.7 5218.3,3180 CN2.1@5330,3180
  Bottom Layer w9.45: 4780,3612.5 5212.5,3180 CN2.1@5330,3180
  other v2: 4500,3470 4690,3470 4900,3470 5100,3470 4500,3610 4690,3610 4890,3610 5100,3610 4500,3760 4690,3760 4890,3760 5100,3760
LED6_1: LED6.1 R1.2 | length 123.5
  Top Layer w9.45: R1.2@4970,2770 4970,2807.1 4980.1,2817.1 LED6.1@4980.1,2889.3
LED7_1: LED7.1 R2.2 | length 150.3
  Top Layer w9.45: R2.2@5030.1,2290 5137.5,2290 5138.2,2289.3 LED7.1@5180.1,2289.3
LED7_2: H19.2 LED7.2 Q3.4 | length 1160.1
  Top Layer w9.45: Q3.4@4652.7,2720 4794.9,2720 4820.3,2745.5 v1(4914.5,2745.5)
  Top Layer w19.68: LED7.2@5180,2370 5240,2370 5327.9,2332.1 H19.2@5380,2280
  Bottom Layer w9.45: v1(4914.5,2745.5) H19.2@5380,2280
  other v2: 4750,2630 4560,2640 4560,2750 4750,2750
MISO: H1.6 J1.3 JP17.1 U5.31 | length 4842.7
  Top Layer w9.45: U5.31@2277.9,4703.9 2277.9,4977.9 H1.6@2280,4980 2341.7,5041.7 4063.1,5041.7 4128,4976.8 J1.3@4128,4931
  Bottom Layer w9.45: H1.6@2280,4980 2930,4330 3003.1,4330 3032.6,4300.5 3032.6,4263.5 3001.3,4232.3 2959.2,4232.3 2844.4,4117.5 2844.4,3948.3 2830,3933.9 2830,3095.3 2990,2935.3 JP17.1@2990,2890
MOSI: H1.5 J1.7 JP1.1 JP5.1 JP9.1 JP13.1 U5.37 | length 10601.3
  Top Layer w9.45: U5.37@1978.1,4704.1 1978.1,4778.1 H1.5@2180,4980 2343,5143 4111.8,5143 4301,4953.9 J1.7@4301,4931 ; v1(3379.7,2041.3) 3423.1,2084.7 3923.4,2084.7 3934.7,2096 3934.7,2130 JP9.1@3980,2130 ; v1(4232.2,2139.5) 4338.4,2033.3 4595.9,2033.3 v1(4630,1999.2)
  Bottom Layer w9.45: H1.5@2180,4980 2135.3,5024.7 1756,5024.7 1710,4978.6 1710,4920 1890,4740 1890,3980 1840,3950 1760,3950 1720,3910 1720,1988.8 1956.5,1752.2 2108.7,1752.2 2130,1773.5 2130,2000.6 2214.1,2084.7 2323.4,2084.7 2334.7,2096 2334.7,2130 JP1.1@2380,2130 2501.5,2130 2630,2001.5 2630,1876.2 2756.3,1749.9 2999.3,1749.9 3032.2,1782.9 3032.2,2002.1 3114.9,2084.7 3124.8,2084.7 3134.7,2094.7 3134.7,2130 JP5.1@3180,2130 3291,2130 v1(3379.7,2041.3) ; JP9.1@3980,2130 4222.7,2130 v1(4232.2,2139.5) ; v1(4630,1999.2) 4662.6,2031.8 4727,2031.8 4790,2094.7 JP13.1@4790,2140
MOTOR_EN_PIN: H20.8 R26.1 U1.1 U2.1 U3.1 U4.1 U5.10 | length 5375
  Top Layer w9.45: U5.10@2377.8,3995.8 2377.8,3938.2 2460.1,3855.9 2491.7,3855.9 2507.9,3839.6 2720.4,3839.6 H20.8@2880,3680 2730,3530 v2(2730,3480) ; U4.1@2480,2490 2480,2531.8 2552.9,2604.7 2552.9,2630 2554.3,2630 2571.5,2630 R26.1@2590,2630 2590,2580 2600,2570 2680,2570 v2(2690,2560) ; U3.1@3280,2490 3300.9,2490 3321.8,2490 3321.8,2479.6 3380.3,2421 v1(4078.4,2421) ; U2.1@4080,2490 4121.8,2490 4121.8,2500.4 4153.1,2531.8 4806.9,2531.8 4838.2,2500.4 4838.2,2490 U1.1@4880,2490
  Bottom Layer w9.45: v2(2690,2560) 2700,2560 2740,2600 2740,3470 v2(2730,3480) ; H20.8@2880,3680 2880,3422.6 3029.8,3272.9 3029.8,3162.7 3035.3,3157.2 3035.3,2832.5 3090,2777.8 3090,2671.6 3238.2,2523.4 3238.2,2490 U3.1@3280,2490 ; v1(4078.4,2421) 4078.4,2446.6 4080,2448.2 U2.1@4080,2490
PD_UART: JP17.3 JP20.1 JP21.1 | length 803.5
  Top Layer w9.45: JP17.3@3190,2890 3435.3,2890 3600,2725.3 JP20.1@3600,2680 JP21.1@3880,2680
Q2_1: Q2.1 R7.2 | length 1663.6
  Top Layer w9.45: Q2.1@4257.4,3253 4315,3253 4335.5,3232.4 4335.5,2908.5 4393.1,2850.9 4401.4,2850.9 4457.7,2794.5 4457.7,2642.8 4540.2,2560.3 4884.9,2560.3 4921.8,2523.4 4921.8,2295.3 5030,2187.1 R7.2@5030,2149.9
Q2_4: LED6.2 P7.1 Q2.4 | length 1422.7
  Top Layer w19.68: Q2.4@4562.7,3160 4570,3152.6 4570,3115 4809.6,3115 4809.6,3067 v1(4894.1,2982.5) 4912.5,2982.5 4923,2972 4980.1,2972 5108,2972 P7.1@5350,2730
  Bottom Layer w19.68: 4570,3115 4809.6,3115 4809.6,3067 v1(4894.1,2982.5)
  other v2: 4490,3080 4650,3080 4490,3220 4650,3220
Q4_1: Q4.1 R19.2 | length 131.9
  Top Layer w9.45: Q4.1@3367.4,4169.2 3367.4,4208.1 3370,4210.6 R19.2@3369.99,4300.01
Q5_1: Q5.1 R18.2 | length 131.9
  Top Layer w9.45: Q5.1@3537.4,4169.2 3537.4,4254.3 3540,4256.8 R18.2@3539.99,4300.01
R5_2: Q1.1 R5.2 | length 267.5
  Top Layer w9.45: R5.2@4039.99,3590.01 4077.1,3590 4077.1,3657.1 4117.1,3697.2 4136.8,3710 Q1.1@4220,3710
R9_2: Q3.1 R9.2 | length 141.2
  Top Layer w9.45: R9.2@4219.96,2780.01 4257.1,2780 4289.8,2812.8 4289.8,2813 Q3.1@4347.4,2813